# EAGLE board 13451_Micro_Bit_Breakout_panel.v02 (EAGLE 7.5.0)
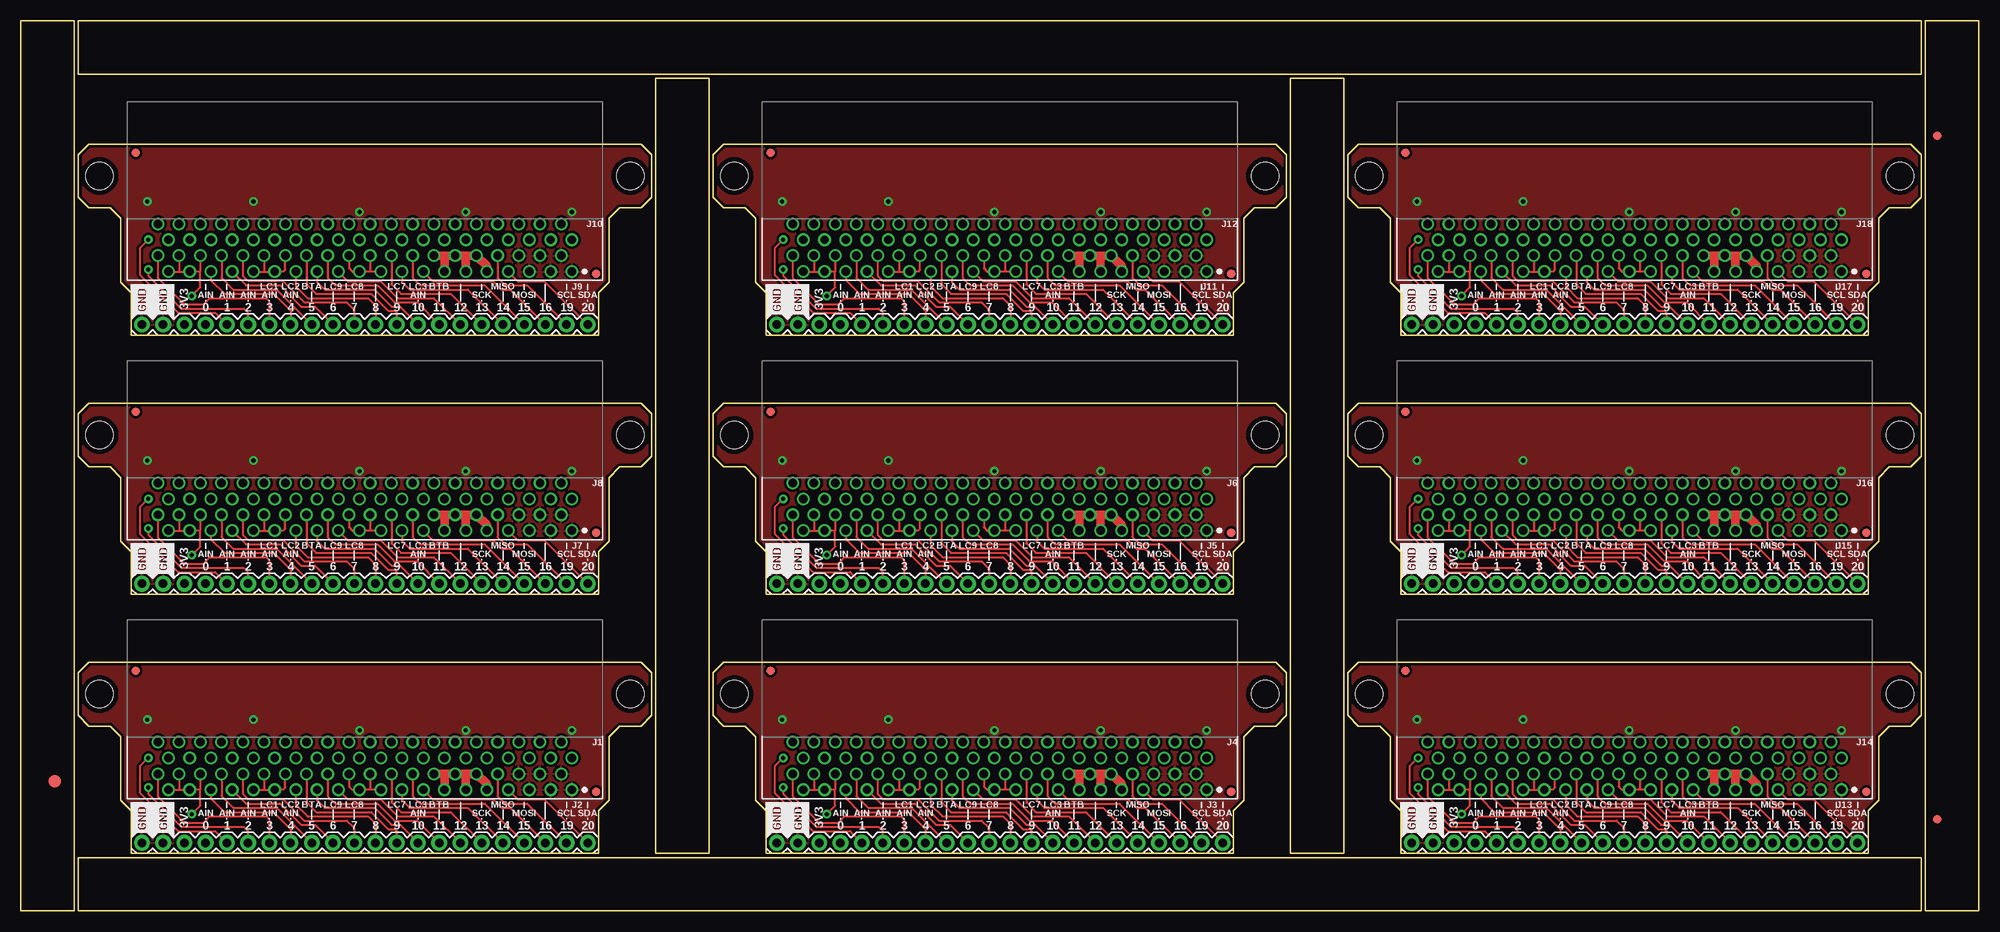
[diagram p0: board, top side]
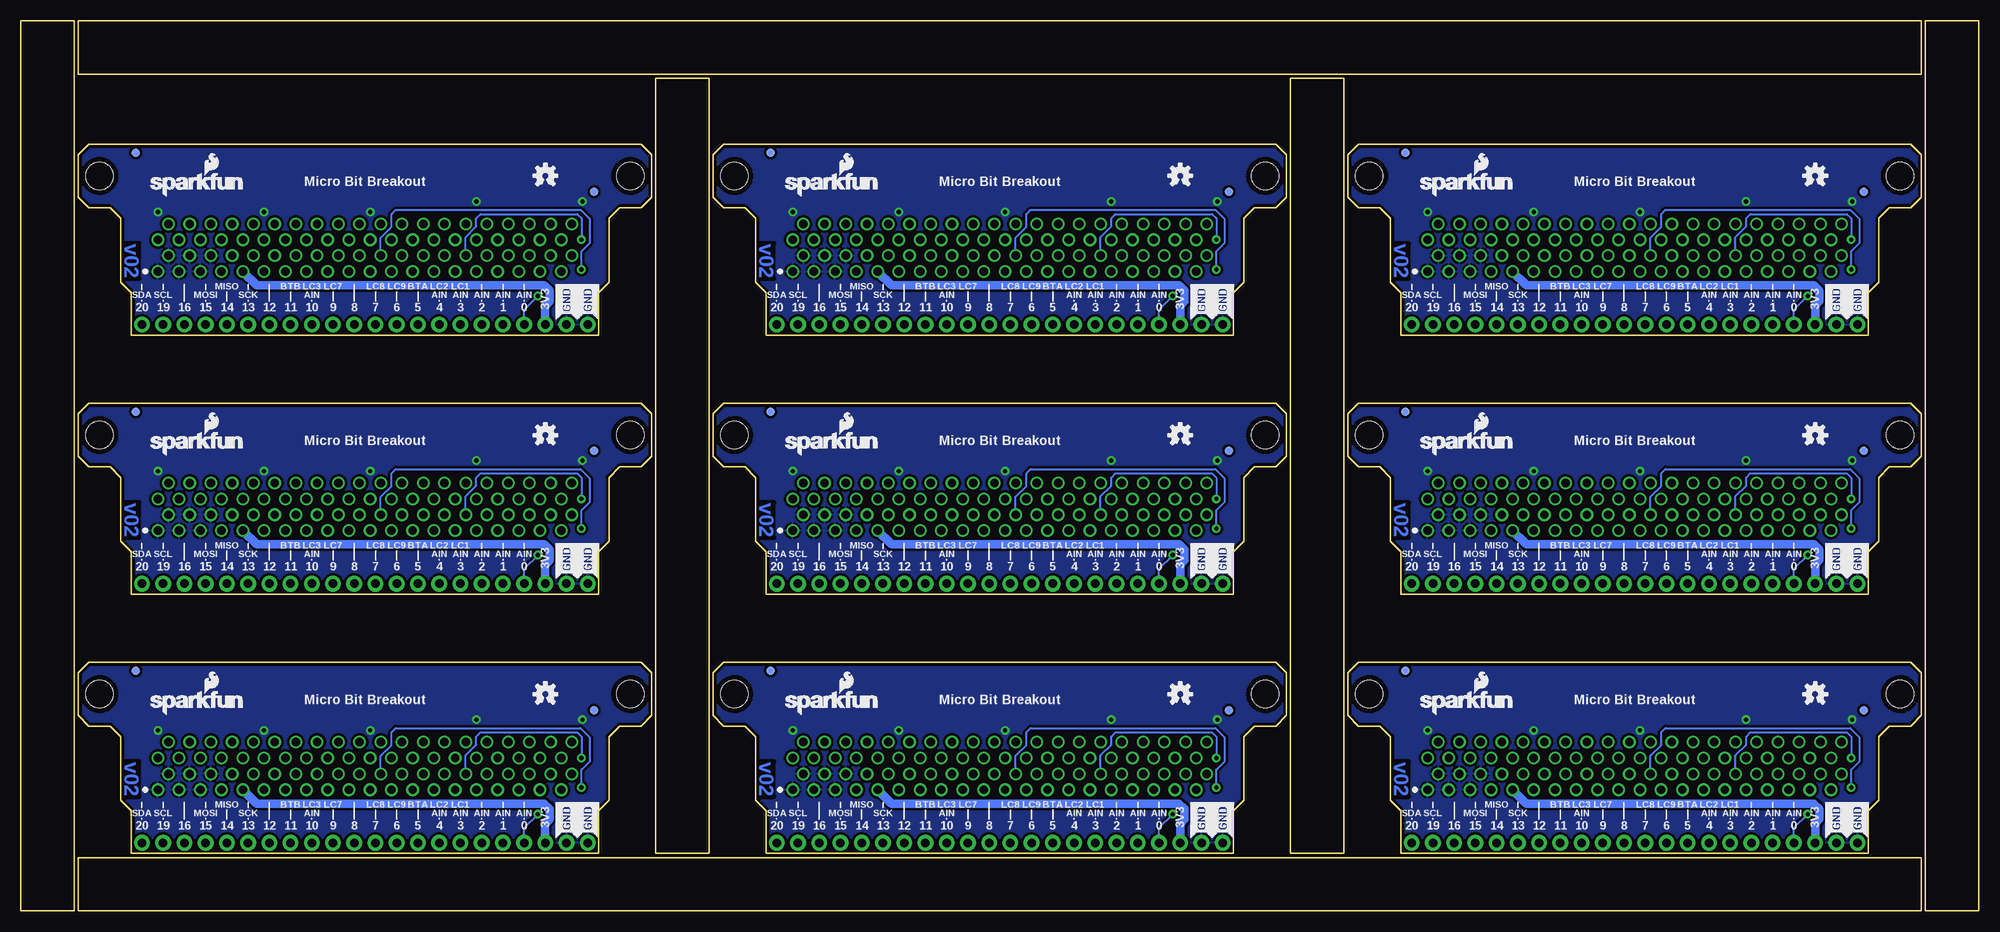
[diagram p1: board, bottom side, seen from below]

Size 234.19 x 106.43 mm. Coordinates in mm from the lower left corner, seen from the top.
Outline: 6.35,79.25 6.35,0 0,0 0,29.72
Outline: 0,27.18 0,106.43 6.35,106.43 6.35,76.71
Outline: 82.3,79.25 82.3,6.86 75.95,6.86 75.95,29.72
Outline: 75.95,27.18 75.95,99.57 82.3,99.57 82.3,76.71
Outline: 158.24,79.25 158.24,6.86 151.89,6.86 151.89,29.72
Outline: 151.89,27.18 151.89,99.57 158.24,99.57 158.24,76.71
Outline: 157.48,106.43 227.33,106.43 227.33,100.08 207.01,100.08
Outline: 209.55,100.08 6.86,100.08 6.86,106.43 160.02,106.43
Outline: 227.84,19.05 227.84,106.43 234.19,106.43 234.19,68.58
Outline: 234.19,71.12 234.19,0 227.84,0 227.84,21.59
Outline: 79.25,0 6.86,0 6.86,6.35 29.72,6.35
Outline: 27.18,6.35 227.33,6.35 227.33,0 76.71,0
Outline: 13.21,6.86 69.09,6.86 69.09,11.94 70.36,13.21 70.36,20.83 71.63,22.1 74.17,22.1 75.44,23.37 75.44,28.45 74.17,29.72 8.13,29.72 6.86,28.45 6.86,23.37 8.13,22.1 10.67,22.1 11.94,20.83 11.94,13.21 13.21,11.94 13.21,6.86
Outline: 13.21,37.85 69.09,37.85 69.09,42.93 70.36,44.2 70.36,51.82 71.63,53.09 74.17,53.09 75.44,54.36 75.44,59.44 74.17,60.71 8.13,60.71 6.86,59.44 6.86,54.36 8.13,53.09 10.67,53.09 11.94,51.82 11.94,44.2 13.21,42.93 13.21,37.85
Outline: 13.21,68.83 69.09,68.83 69.09,73.91 70.36,75.18 70.36,82.8 71.63,84.07 74.17,84.07 75.44,85.34 75.44,90.42 74.17,91.69 8.13,91.69 6.86,90.42 6.86,85.34 8.13,84.07 10.67,84.07 11.94,82.8 11.94,75.18 13.21,73.91 13.21,68.83
Outline: 89.15,6.86 145.03,6.86 145.03,11.94 146.3,13.21 146.3,20.83 147.57,22.1 150.11,22.1 151.38,23.37 151.38,28.45 150.11,29.72 84.07,29.72 82.8,28.45 82.8,23.37 84.07,22.1 86.61,22.1 87.88,20.83 87.88,13.21 89.15,11.94 89.15,6.86
Outline: 89.15,37.85 145.03,37.85 145.03,42.93 146.3,44.2 146.3,51.82 147.57,53.09 150.11,53.09 151.38,54.36 151.38,59.44 150.11,60.71 84.07,60.71 82.8,59.44 82.8,54.36 84.07,53.09 86.61,53.09 87.88,51.82 87.88,44.2 89.15,42.93 89.15,37.85
Outline: 89.15,68.83 145.03,68.83 145.03,73.91 146.3,75.18 146.3,82.8 147.57,84.07 150.11,84.07 151.38,85.34 151.38,90.42 150.11,91.69 84.07,91.69 82.8,90.42 82.8,85.34 84.07,84.07 86.61,84.07 87.88,82.8 87.88,75.18 89.15,73.91 89.15,68.83
Outline: 165.1,6.86 220.98,6.86 220.98,11.94 222.25,13.21 222.25,20.83 223.52,22.1 226.06,22.1 227.33,23.37 227.33,28.45 226.06,29.72 160.02,29.72 158.75,28.45 158.75,23.37 160.02,22.1 162.56,22.1 163.83,20.83 163.83,13.21 165.1,11.94 165.1,6.86
Outline: 165.1,37.85 220.98,37.85 220.98,42.93 222.25,44.2 222.25,51.82 223.52,53.09 226.06,53.09 227.33,54.36 227.33,59.44 226.06,60.71 160.02,60.71 158.75,59.44 158.75,54.36 160.02,53.09 162.56,53.09 163.83,51.82 163.83,44.2 165.1,42.93 165.1,37.85
Outline: 165.1,68.83 220.98,68.83 220.98,73.91 222.25,75.18 222.25,82.8 223.52,84.07 226.06,84.07 227.33,85.34 227.33,90.42 226.06,91.69 160.02,91.69 158.75,90.42 158.75,85.34 160.02,84.07 162.56,84.07 163.83,82.8 163.83,75.18 165.1,73.91 165.1,68.83
Copper layers (1*16): Top 0.035mm / dielectric 1.5mm / Bottom 0.035mm
Design rules "SparkFun-2-layer-STANDARD": minimum track width 10mil, minimum drill 20mil, track to track 10mil, track to pad 8mil, pad to pad 8mil, via to via 10mil, smd to smd 8mil, copper to edge 8mil, drill to drill 8mil, minimum pad ring 10mil, minimum via ring 10mil, stop-mask expansion 4mil, vias tented up to drill 25mil, thermal gap 10mil

## Footprints (pad centres in the part's own frame; a part is rotated, then mirrored left to right if it is on the bottom)
FIDUCIAL-1.5X3 = smd 1.5 x 1.5: 1 0,0
FIDUCIAL-1X2 = smd 1 x 1: 1 0,0
STAND-OFF = hole 3.302: 0,0
VEC-127-080-R = drill 1: A1 -24.765,0; A2 -23.495,-1.9; A3 -22.225,0; A4 -20.955,-1.9; A5 -19.685,0; A6 -18.415,-1.9; A7 -17.145,0; A8 -15.875,-1.9; A9 -14.605,0; A10 -13.335,-1.9; A11 -12.065,0; A12 -10.795,-1.9; A13 -9.525,0; A14 -8.255,-1.9; A15 -6.985,0; A16 -5.715,-1.9; A17 -4.445,0; A18 -3.175,-1.9; A19 -1.905,0; A20 -0.635,-1.9; A21 0.635,0; A22 1.905,-1.9; A23 3.175,0; A24 4.445,-1.9; A25 5.715,0; A26 6.985,-1.9; A27 8.255,0; A28 9.525,-1.9; A29 10.795,0; A30 12.065,-1.9; A31 13.335,0; A32 14.605,-1.9; A33 15.875,0; A34 17.145,-1.9; A35 18.415,0; A36 19.685,-1.9; A37 20.955,0; A38 22.225,-1.9; A39 23.495,0; A40 24.765,-1.9; B1 -24.765,-3.8; B2 -23.495,-5.7; B3 -22.225,-3.8; B4 -20.955,-5.7; B5 -19.685,-3.8; B6 -18.415,-5.7; B7 -17.145,-3.8; B8 -15.875,-5.7; B9 -14.605,-3.8; B10 -13.335,-5.7; B11 -12.065,-3.8; B12 -10.795,-5.7; B13 -9.525,-3.8; B14 -8.255,-5.7; B15 -6.985,-3.8; B16 -5.715,-5.7; B17 -4.445,-3.8; B18 -3.175,-5.7; B19 -1.905,-3.8; B20 -0.635,-5.7; B21 0.635,-3.8; B22 1.905,-5.7; B23 3.175,-3.8; B24 4.445,-5.7; B25 5.715,-3.8; B26 6.985,-5.7; B27 8.255,-3.8; B28 9.525,-5.7; B29 10.795,-3.8; B30 12.065,-5.7; B31 13.335,-3.8; B32 14.605,-5.7; B33 15.875,-3.8; B34 17.145,-5.7; B35 18.415,-3.8; B36 19.685,-5.7; B37 20.955,-3.8; B38 22.225,-5.7; B39 23.495,-3.8; B40 24.765,-5.7
1X22 = drill 1.016 pad 1.88: 1 0,0; 2 2.54,0; 3 5.08,0; 4 7.62,0; 5 10.16,0; 6 12.7,0; 7 15.24,0; 8 17.78,0; 9 20.32,0; 10 22.86,0; 11 25.4,0; 12 27.94,0; 13 30.48,0; 14 33.02,0; 15 35.56,0; 16 38.1,0; 17 40.64,0; 18 43.18,0; 19 45.72,0; 20 48.26,0; 21 50.8,0; 22 53.34,0

## Placement (x,y rotation side)
E$1  [FIDUCIAL-1.5X3]  4.06,15.49 0 top
E$9  [FIDUCIAL-1X2]  229.24,92.71 180 top
E$10  [FIDUCIAL-1X2]  229.24,10.92 0 top
FD1  FIDUCIAL1X2  [FIDUCIAL-1X2]  13.72,28.7 0 top
FD2  FIDUCIAL1X2  [FIDUCIAL-1X2]  68.83,14.22 0 top
FD3  FIDUCIAL1X2  [FIDUCIAL-1X2]  68.58,28.7 0 bottom
FD4  FIDUCIAL1X2  [FIDUCIAL-1X2]  13.72,24 0 bottom
FD5  FIDUCIAL1X2  [FIDUCIAL-1X2]  89.66,28.7 0 top
FD6  FIDUCIAL1X2  [FIDUCIAL-1X2]  144.78,14.22 0 top
FD7  FIDUCIAL1X2  [FIDUCIAL-1X2]  144.53,28.7 0 bottom
FD8  FIDUCIAL1X2  [FIDUCIAL-1X2]  89.66,24 0 bottom
FD9  FIDUCIAL1X2  [FIDUCIAL-1X2]  89.66,59.69 0 top
FD10  FIDUCIAL1X2  [FIDUCIAL-1X2]  144.78,45.21 0 top
FD11  FIDUCIAL1X2  [FIDUCIAL-1X2]  144.53,59.69 0 bottom
FD12  FIDUCIAL1X2  [FIDUCIAL-1X2]  89.66,54.99 0 bottom
FD13  FIDUCIAL1X2  [FIDUCIAL-1X2]  13.72,59.69 0 top
FD14  FIDUCIAL1X2  [FIDUCIAL-1X2]  68.83,45.21 0 top
FD15  FIDUCIAL1X2  [FIDUCIAL-1X2]  68.58,59.69 0 bottom
FD16  FIDUCIAL1X2  [FIDUCIAL-1X2]  13.72,54.99 0 bottom
FD17  FIDUCIAL1X2  [FIDUCIAL-1X2]  13.72,90.68 0 top
FD18  FIDUCIAL1X2  [FIDUCIAL-1X2]  68.83,76.2 0 top
FD19  FIDUCIAL1X2  [FIDUCIAL-1X2]  68.58,90.68 0 bottom
FD20  FIDUCIAL1X2  [FIDUCIAL-1X2]  13.72,85.98 0 bottom
FD21  FIDUCIAL1X2  [FIDUCIAL-1X2]  89.66,90.68 0 top
FD22  FIDUCIAL1X2  [FIDUCIAL-1X2]  144.78,76.2 0 top
FD23  FIDUCIAL1X2  [FIDUCIAL-1X2]  144.53,90.68 0 bottom
FD24  FIDUCIAL1X2  [FIDUCIAL-1X2]  89.66,85.98 0 bottom
FD25  FIDUCIAL1X2  [FIDUCIAL-1X2]  165.61,28.7 0 top
FD26  FIDUCIAL1X2  [FIDUCIAL-1X2]  220.73,14.22 0 top
FD27  FIDUCIAL1X2  [FIDUCIAL-1X2]  220.47,28.7 0 bottom
FD28  FIDUCIAL1X2  [FIDUCIAL-1X2]  165.61,24 0 bottom
FD29  FIDUCIAL1X2  [FIDUCIAL-1X2]  165.61,59.69 0 top
FD30  FIDUCIAL1X2  [FIDUCIAL-1X2]  220.73,45.21 0 top
FD31  FIDUCIAL1X2  [FIDUCIAL-1X2]  220.47,59.69 0 bottom
FD32  FIDUCIAL1X2  [FIDUCIAL-1X2]  165.61,54.99 0 bottom
FD33  FIDUCIAL1X2  [FIDUCIAL-1X2]  165.61,90.68 0 top
FD34  FIDUCIAL1X2  [FIDUCIAL-1X2]  220.73,76.2 0 top
FD35  FIDUCIAL1X2  [FIDUCIAL-1X2]  220.47,90.68 0 bottom
FD36  FIDUCIAL1X2  [FIDUCIAL-1X2]  165.61,85.98 0 bottom
H1  STAND-OFF  [STAND-OFF]  9.4,25.91 0 top
H2  STAND-OFF  [STAND-OFF]  72.9,25.91 0 top
H3  STAND-OFF  [STAND-OFF]  85.34,25.91 0 top
H4  STAND-OFF  [STAND-OFF]  148.84,25.91 0 top
H5  STAND-OFF  [STAND-OFF]  85.34,56.9 0 top
H6  STAND-OFF  [STAND-OFF]  148.84,56.9 0 top
H7  STAND-OFF  [STAND-OFF]  9.4,56.9 0 top
H8  STAND-OFF  [STAND-OFF]  72.9,56.9 0 top
H9  STAND-OFF  [STAND-OFF]  9.4,87.88 0 top
H10  STAND-OFF  [STAND-OFF]  72.9,87.88 0 top
H11  STAND-OFF  [STAND-OFF]  85.34,87.88 0 top
H12  STAND-OFF  [STAND-OFF]  148.84,87.88 0 top
H13  STAND-OFF  [STAND-OFF]  161.29,25.91 0 top
H14  STAND-OFF  [STAND-OFF]  224.79,25.91 0 top
H15  STAND-OFF  [STAND-OFF]  161.29,56.9 0 top
H16  STAND-OFF  [STAND-OFF]  224.79,56.9 0 top
H17  STAND-OFF  [STAND-OFF]  161.29,87.88 0 top
H18  STAND-OFF  [STAND-OFF]  224.79,87.88 0 top
J1  EDGE-80PTH-RA  [VEC-127-080-R]  41.15,14.48 180 top
J2  M22PTH  [1X22]  14.48,8.13 0 top
J3  M22PTH  [1X22]  90.42,8.13 0 top
J4  EDGE-80PTH-RA  [VEC-127-080-R]  117.09,14.48 180 top
J5  M22PTH  [1X22]  90.42,39.12 0 top
J6  EDGE-80PTH-RA  [VEC-127-080-R]  117.09,45.47 180 top
J7  M22PTH  [1X22]  14.48,39.12 0 top
J8  EDGE-80PTH-RA  [VEC-127-080-R]  41.15,45.47 180 top
J9  M22PTH  [1X22]  14.48,70.1 0 top
J10  EDGE-80PTH-RA  [VEC-127-080-R]  41.15,76.45 180 top
J11  M22PTH  [1X22]  90.42,70.1 0 top
J12  EDGE-80PTH-RA  [VEC-127-080-R]  117.09,76.45 180 top
J13  M22PTH  [1X22]  166.37,8.13 0 top
J14  EDGE-80PTH-RA  [VEC-127-080-R]  193.04,14.48 180 top
J15  M22PTH  [1X22]  166.37,39.12 0 top
J16  EDGE-80PTH-RA  [VEC-127-080-R]  193.04,45.47 180 top
J17  M22PTH  [1X22]  166.37,70.1 0 top
J18  EDGE-80PTH-RA  [VEC-127-080-R]  193.04,76.45 180 top
LOGO1  OSHW-LOGOS  [OSHW-LOGO-S]  95.5,25.91 0 bottom
LOGO2  SFE_LOGO_NAME_FLAME.1_INCH  [SFE_LOGO_NAME_FLAME_.1]  67.18,23.37 0 bottom
LOGO3  OSHW-LOGOS  [OSHW-LOGO-S]  19.56,25.91 0 bottom
LOGO4  SFE_LOGO_NAME_FLAME.1_INCH  [SFE_LOGO_NAME_FLAME_.1]  143.13,23.37 0 bottom
LOGO5  OSHW-LOGOS  [OSHW-LOGO-S]  95.5,56.9 0 bottom
LOGO6  SFE_LOGO_NAME_FLAME.1_INCH  [SFE_LOGO_NAME_FLAME_.1]  143.13,54.36 0 bottom
LOGO7  OSHW-LOGOS  [OSHW-LOGO-S]  19.56,56.9 0 bottom
LOGO8  SFE_LOGO_NAME_FLAME.1_INCH  [SFE_LOGO_NAME_FLAME_.1]  67.18,54.36 0 bottom
LOGO9  OSHW-LOGOS  [OSHW-LOGO-S]  19.56,87.88 0 bottom
LOGO10  SFE_LOGO_NAME_FLAME.1_INCH  [SFE_LOGO_NAME_FLAME_.1]  67.18,85.34 0 bottom
LOGO11  OSHW-LOGOS  [OSHW-LOGO-S]  95.5,87.88 0 bottom
LOGO12  SFE_LOGO_NAME_FLAME.1_INCH  [SFE_LOGO_NAME_FLAME_.1]  143.13,85.34 0 bottom
LOGO13  OSHW-LOGOS  [OSHW-LOGO-S]  171.45,25.91 0 bottom
LOGO14  SFE_LOGO_NAME_FLAME.1_INCH  [SFE_LOGO_NAME_FLAME_.1]  219.07,23.37 0 bottom
LOGO15  OSHW-LOGOS  [OSHW-LOGO-S]  171.45,56.9 0 bottom
LOGO16  SFE_LOGO_NAME_FLAME.1_INCH  [SFE_LOGO_NAME_FLAME_.1]  219.07,54.36 0 bottom
LOGO17  OSHW-LOGOS  [OSHW-LOGO-S]  171.45,87.88 0 bottom
LOGO18  SFE_LOGO_NAME_FLAME.1_INCH  [SFE_LOGO_NAME_FLAME_.1]  219.07,85.34 0 bottom
U$1  [NEGASILK_MICRO_BIT_BREAKOUT]  13.21,8.76 0 top
U$2  [NEGASILK_MICRO_BIT_BREAKOUT]  18.29,8.76 0 bottom
U$3  [NEGASILK_MICRO_BIT_BREAKOUT]  89.15,8.76 0 top
U$4  [NEGASILK_MICRO_BIT_BREAKOUT]  94.23,8.76 0 bottom
U$5  [NEGASILK_MICRO_BIT_BREAKOUT]  89.15,39.75 0 top
U$6  [NEGASILK_MICRO_BIT_BREAKOUT]  94.23,39.75 0 bottom
U$7  [NEGASILK_MICRO_BIT_BREAKOUT]  13.21,39.75 0 top
U$8  [NEGASILK_MICRO_BIT_BREAKOUT]  18.29,39.75 0 bottom
U$9  [NEGASILK_MICRO_BIT_BREAKOUT]  13.21,70.74 0 top
U$10  [NEGASILK_MICRO_BIT_BREAKOUT]  18.29,70.74 0 bottom
U$11  [NEGASILK_MICRO_BIT_BREAKOUT]  89.15,70.74 0 top
U$12  [NEGASILK_MICRO_BIT_BREAKOUT]  94.23,70.74 0 bottom
U$13  [NEGASILK_MICRO_BIT_BREAKOUT]  165.1,8.76 0 top
U$14  [NEGASILK_MICRO_BIT_BREAKOUT]  170.18,8.76 0 bottom
U$15  [NEGASILK_MICRO_BIT_BREAKOUT]  165.1,39.75 0 top
U$16  [NEGASILK_MICRO_BIT_BREAKOUT]  170.18,39.75 0 bottom
U$17  [NEGASILK_MICRO_BIT_BREAKOUT]  165.1,70.74 0 top
U$18  [NEGASILK_MICRO_BIT_BREAKOUT]  170.18,70.74 0 bottom

## Library data of the parts
E$1 = SparkFun-Retired
E$9 E$10 FD1-FD36 LOGO1-LOGO18 = SparkFun-Aesthetics
H1-H18 = SparkFun-Electromechanical
J1 J4 J6 J8 J10 J12 J14 J16 J18 = local_lib; PROD_ID: CONN-13452
J2 J3 J5 J7 J9 J11 J13 J15 J17 = local_lib; PROD_ID: CONN-13453
U$1-U$18 = negasilk

## Nets
0: J1.A36 J1.A37 J1.A38 J1.A39 J2.4
1: J1.A28 J1.A29 J1.A30 J1.A31 J2.5
2: J1.A19 J1.A20 J1.A21 J1.A22 J2.6
3: J1.A40 J2.7
3.3V: J1.A9 J1.A10 J1.A11 J1.A12 J1.A13 J1.A14 J2.3
3.3V1: J3.3 J4.A9 J4.A10 J4.A11 J4.A12 J4.A13 J4.A14
3.3V2: J5.3 J6.A9 J6.A10 J6.A11 J6.A12 J6.A13 J6.A14
3.3V3: J7.3 J8.A9 J8.A10 J8.A11 J8.A12 J8.A13 J8.A14
3.3V4: J9.3 J10.A9 J10.A10 J10.A11 J10.A12 J10.A13 J10.A14
3.3V5: J11.3 J12.A9 J12.A10 J12.A11 J12.A12 J12.A13 J12.A14
3.3V6: J13.3 J14.A9 J14.A10 J14.A11 J14.A12 J14.A13 J14.A14
3.3V7: J15.3 J16.A9 J16.A10 J16.A11 J16.A12 J16.A13 J16.A14
3.3V8: J17.3 J18.A9 J18.A10 J18.A11 J18.A12 J18.A13 J18.A14
4: J1.A35 J2.8
5: J1.A34 J2.9
6: J1.A33 J2.10
7: J1.A32 J2.11
8: J1.A27 J2.12
9: J1.A26 J2.13
10: J1.A25 J2.14
11: J1.A24 J2.15
12: J1.A23 J2.16
13: J1.A18 J2.17
14: J1.A17 J2.18
15: J1.A16 J2.19
16: J1.A15 J2.20
17: J3.22 J4.A7
18: J3.21 J4.A8
19: J1.A8 J2.21
20: J1.A7 J2.22
21: J3.20 J4.A15
22: J3.19 J4.A16
23: J3.18 J4.A17
24: J3.17 J4.A18
25: J3.6 J4.A19 J4.A20 J4.A21 J4.A22
26: J3.16 J4.A23
27: J3.15 J4.A24
28: J3.14 J4.A25
29: J3.13 J4.A26
30: J3.12 J4.A27
31: J3.5 J4.A28 J4.A29 J4.A30 J4.A31
32: J3.11 J4.A32
33: J3.10 J4.A33
34: J3.9 J4.A34
35: J3.8 J4.A35
36: J3.4 J4.A36 J4.A37 J4.A38 J4.A39
37: J3.7 J4.A40
38: J5.22 J6.A7
39: J5.21 J6.A8
40: J5.20 J6.A15
41: J5.19 J6.A16
42: J5.18 J6.A17
43: J5.17 J6.A18
44: J5.6 J6.A19 J6.A20 J6.A21 J6.A22
45: J5.16 J6.A23
46: J5.15 J6.A24
47: J5.14 J6.A25
48: J5.13 J6.A26
49: J5.12 J6.A27
50: J5.5 J6.A28 J6.A29 J6.A30 J6.A31
51: J5.11 J6.A32
52: J5.10 J6.A33
53: J5.9 J6.A34
54: J5.8 J6.A35
55: J5.4 J6.A36 J6.A37 J6.A38 J6.A39
56: J5.7 J6.A40
57: J7.22 J8.A7
58: J7.21 J8.A8
59: J7.20 J8.A15
60: J7.19 J8.A16
61: J7.18 J8.A17
62: J7.17 J8.A18
63: J7.6 J8.A19 J8.A20 J8.A21 J8.A22
64: J7.16 J8.A23
65: J7.15 J8.A24
66: J7.14 J8.A25
67: J7.13 J8.A26
68: J7.12 J8.A27
69: J7.5 J8.A28 J8.A29 J8.A30 J8.A31
70: J7.11 J8.A32
71: J7.10 J8.A33
72: J7.9 J8.A34
73: J7.8 J8.A35
74: J7.4 J8.A36 J8.A37 J8.A38 J8.A39
75: J7.7 J8.A40
76: J9.22 J10.A7
77: J9.21 J10.A8
78: J9.20 J10.A15
79: J9.19 J10.A16
80: J9.18 J10.A17
81: J9.17 J10.A18
82: J9.6 J10.A19 J10.A20 J10.A21 J10.A22
83: J9.16 J10.A23
84: J9.15 J10.A24
85: J9.14 J10.A25
86: J9.13 J10.A26
87: J9.12 J10.A27
88: J9.5 J10.A28 J10.A29 J10.A30 J10.A31
89: J9.11 J10.A32
90: J9.10 J10.A33
91: J9.9 J10.A34
92: J9.8 J10.A35
93: J9.4 J10.A36 J10.A37 J10.A38 J10.A39
94: J9.7 J10.A40
95: J11.22 J12.A7
96: J11.21 J12.A8
97: J11.20 J12.A15
98: J11.19 J12.A16
99: J11.18 J12.A17
100: J11.17 J12.A18
101: J11.6 J12.A19 J12.A20 J12.A21 J12.A22
102: J11.16 J12.A23
103: J11.15 J12.A24
104: J11.14 J12.A25
105: J11.13 J12.A26
106: J11.12 J12.A27
107: J11.5 J12.A28 J12.A29 J12.A30 J12.A31
108: J11.11 J12.A32
109: J11.10 J12.A33
110: J11.9 J12.A34
111: J11.8 J12.A35
112: J11.4 J12.A36 J12.A37 J12.A38 J12.A39
113: J11.7 J12.A40
114: J13.22 J14.A7
115: J13.21 J14.A8
116: J13.20 J14.A15
117: J13.19 J14.A16
118: J13.18 J14.A17
119: J13.17 J14.A18
120: J13.6 J14.A19 J14.A20 J14.A21 J14.A22
121: J13.16 J14.A23
122: J13.15 J14.A24
123: J13.14 J14.A25
124: J13.13 J14.A26
125: J13.12 J14.A27
126: J13.5 J14.A28 J14.A29 J14.A30 J14.A31
127: J13.11 J14.A32
128: J13.10 J14.A33
129: J13.9 J14.A34
130: J13.8 J14.A35
131: J13.4 J14.A36 J14.A37 J14.A38 J14.A39
132: J13.7 J14.A40
133: J15.22 J16.A7
134: J15.21 J16.A8
135: J15.20 J16.A15
136: J15.19 J16.A16
137: J15.18 J16.A17
138: J15.17 J16.A18
139: J15.6 J16.A19 J16.A20 J16.A21 J16.A22
140: J15.16 J16.A23
141: J15.15 J16.A24
142: J15.14 J16.A25
143: J15.13 J16.A26
144: J15.12 J16.A27
145: J15.5 J16.A28 J16.A29 J16.A30 J16.A31
146: J15.11 J16.A32
147: J15.10 J16.A33
148: J15.9 J16.A34
149: J15.8 J16.A35
150: J15.4 J16.A36 J16.A37 J16.A38 J16.A39
151: J15.7 J16.A40
152: J17.22 J18.A7
153: J17.21 J18.A8
154: J17.20 J18.A15
155: J17.19 J18.A16
156: J17.18 J18.A17
157: J17.17 J18.A18
158: J17.6 J18.A19 J18.A20 J18.A21 J18.A22
159: J17.16 J18.A23
160: J17.15 J18.A24
161: J17.14 J18.A25
162: J17.13 J18.A26
163: J17.12 J18.A27
164: J17.5 J18.A28 J18.A29 J18.A30 J18.A31
165: J17.11 J18.A32
166: J17.10 J18.A33
167: J17.9 J18.A34
168: J17.8 J18.A35
169: J17.4 J18.A36 J18.A37 J18.A38 J18.A39
170: J17.7 J18.A40
GND: J1.A1 J1.A2 J1.A3 J1.A4 J1.A5 J1.A6 J2.1 J2.2
GND1: J3.1 J3.2 J4.A1 J4.A2 J4.A3 J4.A4 J4.A5 J4.A6
GND2: J5.1 J5.2 J6.A1 J6.A2 J6.A3 J6.A4 J6.A5 J6.A6
GND3: J7.1 J7.2 J8.A1 J8.A2 J8.A3 J8.A4 J8.A5 J8.A6
GND4: J9.1 J9.2 J10.A1 J10.A2 J10.A3 J10.A4 J10.A5 J10.A6
GND5: J11.1 J11.2 J12.A1 J12.A2 J12.A3 J12.A4 J12.A5 J12.A6
GND6: J13.1 J13.2 J14.A1 J14.A2 J14.A3 J14.A4 J14.A5 J14.A6
GND7: J15.1 J15.2 J16.A1 J16.A2 J16.A3 J16.A4 J16.A5 J16.A6
GND8: J17.1 J17.2 J18.A1 J18.A2 J18.A3 J18.A4 J18.A5 J18.A6

## Tracks (layer width: path | path; a pad name or v marks a point on that pad's centre or on a via)
0  (via drill 0.51)
  Top 0.254: J1.A39 18.92,14.48 | 18.92,14.48 J1.A37 21.46,14.48 | J1.A38 18.92,14.48 | J1.A36 21.46,14.48 | v20.45,11.56 21.46,12.57 21.46,14.48
  Bottom 0.254: J2.4 22.1,9.91 v20.45,11.56
1  (via drill 0.51)
  Top 0.254: J1.A31 29.08,14.48 | 29.08,14.48 J1.A29 31.37,14.48 31.62,14.73 J1.A28 | J2.5 23.24,9.53 18.8,9.53 14.22,14.1 14.22,17.27 v15.24,18.29 | J1.A30 29.08,14.48
  Bottom 0.254: v15.24,18.29 15.24,20.83 15.75,21.34 27.3,21.34 27.81,20.83 27.81,19.86 29.08,18.59 J1.A30
2  (via drill 0.51)
  Top 0.254: J1.A19 41.78,14.48 | 41.78,14.48 J1.A21 39.62,14.48 39.24,14.86 J1.A22 | J1.A20 41.78,14.48 | J2.6 27.18,9.53 26.67,10.03 19.18,10.03 15.24,13.97 v15.24,14.73
  Bottom 0.254: J1.A22 39.24,18.54 37.97,19.81 37.97,21.34 37.47,21.84 15.37,21.84 14.22,20.7 14.22,17.91 15.24,16.89 v15.24,14.73
3
  Top 0.254: J2.7 29.72,10.92 29.34,11.3 22.61,11.3 21.84,10.54 19.56,10.54 16.38,13.72 J1.A40
3.3V
  Top 1.016: J1.A9 55.75,15.11 J1.A10 53.09,16.38 | 53.09,16.38 J1.A12 50.55,16.38 | 50.55,16.38 J1.A14 | J1.A13 50.67,16.25 50.55,16.38 | J1.A11 53.21,16.25 53.09,16.38
  Bottom 1.016: J2.3 19.56,10.41 19.05,10.92 19.05,12.19 19.68,12.83 54.1,12.83 J1.A9
3.3V1
  Top 1.016: J4.A9 131.7,15.11 J4.A10 129.03,16.38 | 129.03,16.38 J4.A12 126.49,16.38 | 126.49,16.38 J4.A14 | J4.A13 126.62,16.25 126.49,16.38 | J4.A11 129.16,16.25 129.03,16.38
  Bottom 1.016: J3.3 95.5,10.41 95,10.92 95,12.19 95.63,12.83 130.05,12.83 J4.A9
3.3V2
  Top 1.016: J6.A9 131.7,46.1 J6.A10 129.03,47.37 | 129.03,47.37 J6.A12 126.49,47.37 | 126.49,47.37 J6.A14 | J6.A13 126.62,47.24 126.49,47.37 | J6.A11 129.16,47.24 129.03,47.37
  Bottom 1.016: J5.3 95.5,41.4 95,41.91 95,43.18 95.63,43.81 130.05,43.81 J6.A9
3.3V3
  Top 1.016: J8.A9 55.75,46.1 J8.A10 53.09,47.37 | 53.09,47.37 J8.A12 50.55,47.37 | 50.55,47.37 J8.A14 | J8.A13 50.67,47.24 50.55,47.37 | J8.A11 53.21,47.24 53.09,47.37
  Bottom 1.016: J7.3 19.56,41.4 19.05,41.91 19.05,43.18 19.68,43.81 54.1,43.81 J8.A9
3.3V4
  Top 1.016: J10.A9 55.75,77.08 J10.A10 53.09,78.35 | 53.09,78.35 J10.A12 50.55,78.35 | 50.55,78.35 J10.A14 | J10.A13 50.67,78.23 50.55,78.35 | J10.A11 53.21,78.23 53.09,78.35
  Bottom 1.016: J9.3 19.56,72.39 19.05,72.9 19.05,74.17 19.68,74.8 54.1,74.8 J10.A9
3.3V5
  Top 1.016: J12.A9 131.7,77.08 J12.A10 129.03,78.35 | 129.03,78.35 J12.A12 126.49,78.35 | 126.49,78.35 J12.A14 | J12.A13 126.62,78.23 126.49,78.35 | J12.A11 129.16,78.23 129.03,78.35
  Bottom 1.016: J11.3 95.5,72.39 95,72.9 95,74.17 95.63,74.8 130.05,74.8 J12.A9
3.3V6
  Top 1.016: J14.A9 207.65,15.11 J14.A10 204.98,16.38 | 204.98,16.38 J14.A12 202.44,16.38 | 202.44,16.38 J14.A14 | J14.A13 202.56,16.25 202.44,16.38 | J14.A11 205.1,16.25 204.98,16.38
  Bottom 1.016: J13.3 171.45,10.41 170.94,10.92 170.94,12.19 171.58,12.83 205.99,12.83 J14.A9
3.3V7
  Top 1.016: J16.A9 207.65,46.1 J16.A10 204.98,47.37 | 204.98,47.37 J16.A12 202.44,47.37 | 202.44,47.37 J16.A14 | J16.A13 202.56,47.24 202.44,47.37 | J16.A11 205.1,47.24 204.98,47.37
  Bottom 1.016: J15.3 171.45,41.4 170.94,41.91 170.94,43.18 171.58,43.81 205.99,43.81 J16.A9
3.3V8
  Top 1.016: J18.A9 207.65,77.08 J18.A10 204.98,78.35 | 204.98,78.35 J18.A12 202.44,78.35 | 202.44,78.35 J18.A14 | J18.A13 202.56,78.23 202.44,78.35 | J18.A11 205.1,78.23 204.98,78.35
  Bottom 1.016: J17.3 171.45,72.39 170.94,72.9 170.94,74.17 171.58,74.8 205.99,74.8 J18.A9
4
  Top 0.254: J1.A35 22.73,13.46 24.38,11.81 30.23,11.81 32.26,9.78 J2.8
5
  Top 0.254: J1.A34 24,13.72 25.4,12.32 30.61,12.32 J2.9
6
  Top 0.254: J2.10 35.18,10.29 33.53,10.29 30.99,12.83 26.92,12.83 J1.A33
7
  Top 0.254: J2.11 39.88,9.91 38.99,10.79 33.91,10.79 31.37,13.34 27.18,13.34 26.54,13.97 J1.A32
8
  Top 0.254: J1.A27 32.89,12.7 34.29,11.3 41.53,11.3 42.42,10.41 J2.12
9
  Top 0.254: J1.A26 34.16,12.95 35.31,11.81 41.91,11.81 43.94,9.78 44.7,9.78 44.96,9.53 J2.13
10
  Top 0.254: J2.14 45.34,10.29 44.32,10.29 42.29,12.32 36.32,12.32 35.43,13.21 J1.A25
11
  Top 0.254: J2.15 47.37,10.79 44.7,10.79 42.67,12.83 37.59,12.83 36.7,13.72 J1.A24
12
  Top 0.254: J2.16 49.4,11.3 45.09,11.3 43.05,13.34 39.12,13.34 J1.A23
13
  Top 0.254: J1.A18 44.32,12.95 45.47,11.81 51.44,11.81 J2.17
14
  Top 0.254: J1.A17 45.59,13.21 46.48,12.32 53.47,12.32 J2.18
15
  Top 0.254: J1.A16 46.86,13.72 47.75,12.83 55.5,12.83 J2.19
16
  Top 0.254: J1.A15 49.28,13.34 56.52,13.34 57.53,12.32 58.55,12.32 J2.20
17
  Top 0.254: J4.A7 135.38,13.34 138.56,13.34 J3.22
18
  Top 0.254: J4.A8 132.97,13.72 133.86,12.83 136.53,12.83 J3.21
19
  Top 0.254: J1.A8 57.02,13.72 57.91,12.83 60.58,12.83 J2.21
20
  Top 0.254: J1.A7 59.44,13.34 62.61,13.34 J2.22
21
  Top 0.254: J4.A15 125.22,13.34 132.46,13.34 133.48,12.32 134.49,12.32 J3.20
22
  Top 0.254: J4.A16 122.81,13.72 123.7,12.83 131.44,12.83 J3.19
23
  Top 0.254: J4.A17 121.54,13.21 122.43,12.32 129.41,12.32 J3.18
24
  Top 0.254: J4.A18 120.27,12.95 121.41,11.81 127.38,11.81 J3.17
25  (via drill 0.51)
  Top 0.254: J4.A19 117.73,14.48 | 117.73,14.48 J4.A21 115.57,14.48 115.19,14.86 J4.A22 | J4.A20 117.73,14.48 | J3.6 103.12,9.53 102.62,10.03 95.12,10.03 91.19,13.97 v91.19,14.73
  Bottom 0.254: J4.A22 115.19,18.54 113.92,19.81 113.92,21.34 113.41,21.84 91.31,21.84 90.17,20.7 90.17,17.91 91.19,16.89 v91.19,14.73
26
  Top 0.254: J3.16 125.35,11.3 121.03,11.3 119,13.34 115.06,13.34 J4.A23
27
  Top 0.254: J3.15 123.32,10.79 120.65,10.79 118.62,12.83 113.54,12.83 112.65,13.72 J4.A24
28
  Top 0.254: J3.14 121.28,10.29 120.27,10.29 118.24,12.32 112.27,12.32 111.38,13.21 J4.A25
29
  Top 0.254: J4.A26 110.11,12.95 111.25,11.81 117.86,11.81 119.89,9.78 120.65,9.78 120.9,9.53 J3.13
30
  Top 0.254: J4.A27 108.84,12.7 110.24,11.3 117.47,11.3 118.36,10.41 J3.12
31  (via drill 0.51)
  Top 0.254: J4.A31 105.03,14.48 | 105.03,14.48 J4.A29 107.31,14.48 107.57,14.73 J4.A28 | J3.5 99.19,9.53 94.74,9.53 90.17,14.1 90.17,17.27 v91.19,18.29 | J4.A30 105.03,14.48
  Bottom 0.254: v91.19,18.29 91.19,20.83 91.69,21.34 103.25,21.34 103.76,20.83 103.76,19.86 105.03,18.59 J4.A30
32
  Top 0.254: J3.11 115.82,9.91 114.94,10.79 109.86,10.79 107.31,13.34 103.12,13.34 102.49,13.97 J4.A32
33
  Top 0.254: J3.10 111.12,10.29 109.47,10.29 106.93,12.83 102.87,12.83 J4.A33
34
  Top 0.254: J4.A34 99.95,13.72 101.35,12.32 106.55,12.32 J3.9
35
  Top 0.254: J4.A35 98.68,13.46 100.33,11.81 106.17,11.81 108.2,9.78 J3.8
36  (via drill 0.51)
  Top 0.254: J4.A39 94.87,14.48 | 94.87,14.48 J4.A37 97.41,14.48 | J4.A38 94.87,14.48 | J4.A36 97.41,14.48 | v96.39,11.56 97.41,12.57 97.41,14.48
  Bottom 0.254: J3.4 98.04,9.91 v96.39,11.56
37
  Top 0.254: J3.7 105.66,10.92 105.28,11.3 98.55,11.3 97.79,10.54 95.5,10.54 92.33,13.72 J4.A40
38
  Top 0.254: J6.A7 135.38,44.32 138.56,44.32 J5.22
39
  Top 0.254: J6.A8 132.97,44.7 133.86,43.81 136.53,43.81 J5.21
40
  Top 0.254: J6.A15 125.22,44.32 132.46,44.32 133.48,43.31 134.49,43.31 J5.20
41
  Top 0.254: J6.A16 122.81,44.7 123.7,43.81 131.44,43.81 J5.19
42
  Top 0.254: J6.A17 121.54,44.2 122.43,43.31 129.41,43.31 J5.18
43
  Top 0.254: J6.A18 120.27,43.94 121.41,42.8 127.38,42.8 J5.17
44  (via drill 0.51)
  Top 0.254: J6.A19 117.73,45.47 | 117.73,45.47 J6.A21 115.57,45.47 115.19,45.85 J6.A22 | J6.A20 117.73,45.47 | J5.6 103.12,40.51 102.62,41.02 95.12,41.02 91.19,44.96 v91.19,45.72
  Bottom 0.254: J6.A22 115.19,49.53 113.92,50.8 113.92,52.32 113.41,52.83 91.31,52.83 90.17,51.69 90.17,48.9 91.19,47.88 v91.19,45.72
45
  Top 0.254: J5.16 125.35,42.29 121.03,42.29 119,44.32 115.06,44.32 J6.A23
46
  Top 0.254: J5.15 123.32,41.78 120.65,41.78 118.62,43.81 113.54,43.81 112.65,44.7 J6.A24
47
  Top 0.254: J5.14 121.28,41.27 120.27,41.27 118.24,43.31 112.27,43.31 111.38,44.2 J6.A25
48
  Top 0.254: J6.A26 110.11,43.94 111.25,42.8 117.86,42.8 119.89,40.77 120.65,40.77 120.9,40.51 J5.13
49
  Top 0.254: J6.A27 108.84,43.69 110.24,42.29 117.47,42.29 118.36,41.4 J5.12
50  (via drill 0.51)
  Top 0.254: J6.A31 105.03,45.47 | 105.03,45.47 J6.A29 107.31,45.47 107.57,45.72 J6.A28 | J5.5 99.19,40.51 94.74,40.51 90.17,45.09 90.17,48.26 v91.19,49.28 | J6.A30 105.03,45.47
  Bottom 0.254: v91.19,49.28 91.19,51.82 91.69,52.32 103.25,52.32 103.76,51.82 103.76,50.85 105.03,49.58 J6.A30
51
  Top 0.254: J5.11 115.82,40.89 114.94,41.78 109.86,41.78 107.31,44.32 103.12,44.32 102.49,44.96 J6.A32
52
  Top 0.254: J5.10 111.12,41.27 109.47,41.27 106.93,43.81 102.87,43.81 J6.A33
53
  Top 0.254: J6.A34 99.95,44.7 101.35,43.31 106.55,43.31 J5.9
54
  Top 0.254: J6.A35 98.68,44.45 100.33,42.8 106.17,42.8 108.2,40.77 J5.8
55  (via drill 0.51)
  Top 0.254: J6.A39 94.87,45.47 | 94.87,45.47 J6.A37 97.41,45.47 | J6.A38 94.87,45.47 | J6.A36 97.41,45.47 | v96.39,42.55 97.41,43.56 97.41,45.47
  Bottom 0.254: J5.4 98.04,40.89 v96.39,42.55
56
  Top 0.254: J5.7 105.66,41.91 105.28,42.29 98.55,42.29 97.79,41.53 95.5,41.53 92.33,44.7 J6.A40
57
  Top 0.254: J8.A7 59.44,44.32 62.61,44.32 J7.22
58
  Top 0.254: J8.A8 57.02,44.7 57.91,43.81 60.58,43.81 J7.21
59
  Top 0.254: J8.A15 49.28,44.32 56.52,44.32 57.53,43.31 58.55,43.31 J7.20
60
  Top 0.254: J8.A16 46.86,44.7 47.75,43.81 55.5,43.81 J7.19
61
  Top 0.254: J8.A17 45.59,44.2 46.48,43.31 53.47,43.31 J7.18
62
  Top 0.254: J8.A18 44.32,43.94 45.47,42.8 51.44,42.8 J7.17
63  (via drill 0.51)
  Top 0.254: J8.A19 41.78,45.47 | 41.78,45.47 J8.A21 39.62,45.47 39.24,45.85 J8.A22 | J8.A20 41.78,45.47 | J7.6 27.18,40.51 26.67,41.02 19.18,41.02 15.24,44.96 v15.24,45.72
  Bottom 0.254: J8.A22 39.24,49.53 37.97,50.8 37.97,52.32 37.47,52.83 15.37,52.83 14.22,51.69 14.22,48.9 15.24,47.88 v15.24,45.72
64
  Top 0.254: J7.16 49.4,42.29 45.09,42.29 43.05,44.32 39.12,44.32 J8.A23
65
  Top 0.254: J7.15 47.37,41.78 44.7,41.78 42.67,43.81 37.59,43.81 36.7,44.7 J8.A24
66
  Top 0.254: J7.14 45.34,41.27 44.32,41.27 42.29,43.31 36.32,43.31 35.43,44.2 J8.A25
67
  Top 0.254: J8.A26 34.16,43.94 35.31,42.8 41.91,42.8 43.94,40.77 44.7,40.77 44.96,40.51 J7.13
68
  Top 0.254: J8.A27 32.89,43.69 34.29,42.29 41.53,42.29 42.42,41.4 J7.12
69  (via drill 0.51)
  Top 0.254: J8.A31 29.08,45.47 | 29.08,45.47 J8.A29 31.37,45.47 31.62,45.72 J8.A28 | J7.5 23.24,40.51 18.8,40.51 14.22,45.09 14.22,48.26 v15.24,49.28 | J8.A30 29.08,45.47
  Bottom 0.254: v15.24,49.28 15.24,51.82 15.75,52.32 27.3,52.32 27.81,51.82 27.81,50.85 29.08,49.58 J8.A30
70
  Top 0.254: J7.11 39.88,40.89 38.99,41.78 33.91,41.78 31.37,44.32 27.18,44.32 26.54,44.96 J8.A32
71
  Top 0.254: J7.10 35.18,41.27 33.53,41.27 30.99,43.81 26.92,43.81 J8.A33
72
  Top 0.254: J8.A34 24,44.7 25.4,43.31 30.61,43.31 J7.9
73
  Top 0.254: J8.A35 22.73,44.45 24.38,42.8 30.23,42.8 32.26,40.77 J7.8
74  (via drill 0.51)
  Top 0.254: J8.A39 18.92,45.47 | 18.92,45.47 J8.A37 21.46,45.47 | J8.A38 18.92,45.47 | J8.A36 21.46,45.47 | v20.45,42.55 21.46,43.56 21.46,45.47
  Bottom 0.254: J7.4 22.1,40.89 v20.45,42.55
75
  Top 0.254: J7.7 29.72,41.91 29.34,42.29 22.61,42.29 21.84,41.53 19.56,41.53 16.38,44.7 J8.A40
76
  Top 0.254: J10.A7 59.44,75.31 62.61,75.31 J9.22
77
  Top 0.254: J10.A8 57.02,75.69 57.91,74.8 60.58,74.8 J9.21
78
  Top 0.254: J10.A15 49.28,75.31 56.52,75.31 57.53,74.3 58.55,74.3 J9.20
79
  Top 0.254: J10.A16 46.86,75.69 47.75,74.8 55.5,74.8 J9.19
80
  Top 0.254: J10.A17 45.59,75.18 46.48,74.3 53.47,74.3 J9.18
81
  Top 0.254: J10.A18 44.32,74.93 45.47,73.79 51.44,73.79 J9.17
82  (via drill 0.51)
  Top 0.254: J10.A19 41.78,76.45 | 41.78,76.45 J10.A21 39.62,76.45 39.24,76.83 J10.A22 | J10.A20 41.78,76.45 | J9.6 27.18,71.5 26.67,72.01 19.18,72.01 15.24,75.95 v15.24,76.71
  Bottom 0.254: J10.A22 39.24,80.52 37.97,81.79 37.97,83.31 37.47,83.82 15.37,83.82 14.22,82.68 14.22,79.88 15.24,78.87 v15.24,76.71
83
  Top 0.254: J9.16 49.4,73.28 45.09,73.28 43.05,75.31 39.12,75.31 J10.A23
84
  Top 0.254: J9.15 47.37,72.77 44.7,72.77 42.67,74.8 37.59,74.8 36.7,75.69 J10.A24
85
  Top 0.254: J9.14 45.34,72.26 44.32,72.26 42.29,74.3 36.32,74.3 35.43,75.18 J10.A25
86
  Top 0.254: J10.A26 34.16,74.93 35.31,73.79 41.91,73.79 43.94,71.75 44.7,71.75 44.96,71.5 J9.13
87
  Top 0.254: J10.A27 32.89,74.68 34.29,73.28 41.53,73.28 42.42,72.39 J9.12
88  (via drill 0.51)
  Top 0.254: J10.A31 29.08,76.45 | 29.08,76.45 J10.A29 31.37,76.45 31.62,76.71 J10.A28 | J9.5 23.24,71.5 18.8,71.5 14.22,76.07 14.22,79.25 v15.24,80.26 | J10.A30 29.08,76.45
  Bottom 0.254: v15.24,80.26 15.24,82.8 15.75,83.31 27.3,83.31 27.81,82.8 27.81,81.84 29.08,80.57 J10.A30
89
  Top 0.254: J9.11 39.88,71.88 38.99,72.77 33.91,72.77 31.37,75.31 27.18,75.31 26.54,75.95 J10.A32
90
  Top 0.254: J9.10 35.18,72.26 33.53,72.26 30.99,74.8 26.92,74.8 J10.A33
91
  Top 0.254: J10.A34 24,75.69 25.4,74.3 30.61,74.3 J9.9
92
  Top 0.254: J10.A35 22.73,75.44 24.38,73.79 30.23,73.79 32.26,71.75 J9.8
93  (via drill 0.51)
  Top 0.254: J10.A39 18.92,76.45 | 18.92,76.45 J10.A37 21.46,76.45 | J10.A38 18.92,76.45 | J10.A36 21.46,76.45 | v20.45,73.53 21.46,74.55 21.46,76.45
  Bottom 0.254: J9.4 22.1,71.88 v20.45,73.53
94
  Top 0.254: J9.7 29.72,72.9 29.34,73.28 22.61,73.28 21.84,72.52 19.56,72.52 16.38,75.69 J10.A40
95
  Top 0.254: J12.A7 135.38,75.31 138.56,75.31 J11.22
96
  Top 0.254: J12.A8 132.97,75.69 133.86,74.8 136.53,74.8 J11.21
97
  Top 0.254: J12.A15 125.22,75.31 132.46,75.31 133.48,74.3 134.49,74.3 J11.20
98
  Top 0.254: J12.A16 122.81,75.69 123.7,74.8 131.44,74.8 J11.19
99
  Top 0.254: J12.A17 121.54,75.18 122.43,74.3 129.41,74.3 J11.18
100
  Top 0.254: J12.A18 120.27,74.93 121.41,73.79 127.38,73.79 J11.17
101  (via drill 0.51)
  Top 0.254: J12.A19 117.73,76.45 | 117.73,76.45 J12.A21 115.57,76.45 115.19,76.83 J12.A22 | J12.A20 117.73,76.45 | J11.6 103.12,71.5 102.62,72.01 95.12,72.01 91.19,75.95 v91.19,76.71
  Bottom 0.254: J12.A22 115.19,80.52 113.92,81.79 113.92,83.31 113.41,83.82 91.31,83.82 90.17,82.68 90.17,79.88 91.19,78.87 v91.19,76.71
102
  Top 0.254: J11.16 125.35,73.28 121.03,73.28 119,75.31 115.06,75.31 J12.A23
103
  Top 0.254: J11.15 123.32,72.77 120.65,72.77 118.62,74.8 113.54,74.8 112.65,75.69 J12.A24
104
  Top 0.254: J11.14 121.28,72.26 120.27,72.26 118.24,74.3 112.27,74.3 111.38,75.18 J12.A25
105
  Top 0.254: J12.A26 110.11,74.93 111.25,73.79 117.86,73.79 119.89,71.75 120.65,71.75 120.9,71.5 J11.13
106
  Top 0.254: J12.A27 108.84,74.68 110.24,73.28 117.47,73.28 118.36,72.39 J11.12
107  (via drill 0.51)
  Top 0.254: J12.A31 105.03,76.45 | 105.03,76.45 J12.A29 107.31,76.45 107.57,76.71 J12.A28 | J11.5 99.19,71.5 94.74,71.5 90.17,76.07 90.17,79.25 v91.19,80.26 | J12.A30 105.03,76.45
  Bottom 0.254: v91.19,80.26 91.19,82.8 91.69,83.31 103.25,83.31 103.76,82.8 103.76,81.84 105.03,80.57 J12.A30
108
  Top 0.254: J11.11 115.82,71.88 114.94,72.77 109.86,72.77 107.31,75.31 103.12,75.31 102.49,75.95 J12.A32
109
  Top 0.254: J11.10 111.12,72.26 109.47,72.26 106.93,74.8 102.87,74.8 J12.A33
110
  Top 0.254: J12.A34 99.95,75.69 101.35,74.3 106.55,74.3 J11.9
111
  Top 0.254: J12.A35 98.68,75.44 100.33,73.79 106.17,73.79 108.2,71.75 J11.8
112  (via drill 0.51)
  Top 0.254: J12.A39 94.87,76.45 | 94.87,76.45 J12.A37 97.41,76.45 | J12.A38 94.87,76.45 | J12.A36 97.41,76.45 | v96.39,73.53 97.41,74.55 97.41,76.45
  Bottom 0.254: J11.4 98.04,71.88 v96.39,73.53
113
  Top 0.254: J11.7 105.66,72.9 105.28,73.28 98.55,73.28 97.79,72.52 95.5,72.52 92.33,75.69 J12.A40
114
  Top 0.254: J14.A7 211.33,13.34 214.5,13.34 J13.22
115
  Top 0.254: J14.A8 208.91,13.72 209.8,12.83 212.47,12.83 J13.21
116
  Top 0.254: J14.A15 201.17,13.34 208.41,13.34 209.42,12.32 210.44,12.32 J13.20
117
  Top 0.254: J14.A16 198.75,13.72 199.64,12.83 207.39,12.83 J13.19
118
  Top 0.254: J14.A17 197.49,13.21 198.37,12.32 205.36,12.32 J13.18
119
  Top 0.254: J14.A18 196.22,12.95 197.36,11.81 203.33,11.81 J13.17
120  (via drill 0.51)
  Top 0.254: J14.A19 193.68,14.48 | 193.68,14.48 J14.A21 191.52,14.48 191.13,14.86 J14.A22 | J14.A20 193.68,14.48 | J13.6 179.07,9.53 178.56,10.03 171.07,10.03 167.13,13.97 v167.13,14.73
  Bottom 0.254: J14.A22 191.13,18.54 189.87,19.81 189.87,21.34 189.36,21.84 167.26,21.84 166.12,20.7 166.12,17.91 167.13,16.89 v167.13,14.73
121
  Top 0.254: J13.16 201.29,11.3 196.98,11.3 194.94,13.34 191.01,13.34 J14.A23
122
  Top 0.254: J13.15 199.26,10.79 196.6,10.79 194.56,12.83 189.48,12.83 188.59,13.72 J14.A24
123
  Top 0.254: J13.14 197.23,10.29 196.22,10.29 194.18,12.32 188.21,12.32 187.32,13.21 J14.A25
124
  Top 0.254: J14.A26 186.06,12.95 187.2,11.81 193.8,11.81 195.83,9.78 196.6,9.78 196.85,9.53 J13.13
125
  Top 0.254: J14.A27 184.78,12.7 186.18,11.3 193.42,11.3 194.31,10.41 J13.12
126  (via drill 0.51)
  Top 0.254: J14.A31 180.97,14.48 | 180.97,14.48 J14.A29 183.26,14.48 183.51,14.73 J14.A28 | J13.5 175.13,9.53 170.69,9.53 166.12,14.1 166.12,17.27 v167.13,18.29 | J14.A30 180.97,14.48
  Bottom 0.254: v167.13,18.29 167.13,20.83 167.64,21.34 179.2,21.34 179.71,20.83 179.71,19.86 180.97,18.59 J14.A30
127
  Top 0.254: J13.11 191.77,9.91 190.88,10.79 185.8,10.79 183.26,13.34 179.07,13.34 178.44,13.97 J14.A32
128
  Top 0.254: J13.10 187.07,10.29 185.42,10.29 182.88,12.83 178.82,12.83 J14.A33
129
  Top 0.254: J14.A34 175.9,13.72 177.29,12.32 182.5,12.32 J13.9
130
  Top 0.254: J14.A35 174.62,13.46 176.28,11.81 182.12,11.81 184.15,9.78 J13.8
131  (via drill 0.51)
  Top 0.254: J14.A39 170.81,14.48 | 170.81,14.48 J14.A37 173.35,14.48 | J14.A38 170.81,14.48 | J14.A36 173.35,14.48 | v172.34,11.56 173.35,12.57 173.35,14.48
  Bottom 0.254: J13.4 173.99,9.91 v172.34,11.56
132
  Top 0.254: J13.7 181.61,10.92 181.23,11.3 174.5,11.3 173.74,10.54 171.45,10.54 168.28,13.72 J14.A40
133
  Top 0.254: J16.A7 211.33,44.32 214.5,44.32 J15.22
134
  Top 0.254: J16.A8 208.91,44.7 209.8,43.81 212.47,43.81 J15.21
135
  Top 0.254: J16.A15 201.17,44.32 208.41,44.32 209.42,43.31 210.44,43.31 J15.20
136
  Top 0.254: J16.A16 198.75,44.7 199.64,43.81 207.39,43.81 J15.19
137
  Top 0.254: J16.A17 197.49,44.2 198.37,43.31 205.36,43.31 J15.18
138
  Top 0.254: J16.A18 196.22,43.94 197.36,42.8 203.33,42.8 J15.17
139  (via drill 0.51)
  Top 0.254: J16.A19 193.68,45.47 | 193.68,45.47 J16.A21 191.52,45.47 191.13,45.85 J16.A22 | J16.A20 193.68,45.47 | J15.6 179.07,40.51 178.56,41.02 171.07,41.02 167.13,44.96 v167.13,45.72
  Bottom 0.254: J16.A22 191.13,49.53 189.87,50.8 189.87,52.32 189.36,52.83 167.26,52.83 166.12,51.69 166.12,48.9 167.13,47.88 v167.13,45.72
140
  Top 0.254: J15.16 201.29,42.29 196.98,42.29 194.94,44.32 191.01,44.32 J16.A23
141
  Top 0.254: J15.15 199.26,41.78 196.6,41.78 194.56,43.81 189.48,43.81 188.59,44.7 J16.A24
142
  Top 0.254: J15.14 197.23,41.27 196.22,41.27 194.18,43.31 188.21,43.31 187.32,44.2 J16.A25
143
  Top 0.254: J16.A26 186.06,43.94 187.2,42.8 193.8,42.8 195.83,40.77 196.6,40.77 196.85,40.51 J15.13
144
  Top 0.254: J16.A27 184.78,43.69 186.18,42.29 193.42,42.29 194.31,41.4 J15.12
145  (via drill 0.51)
  Top 0.254: J16.A31 180.97,45.47 | 180.97,45.47 J16.A29 183.26,45.47 183.51,45.72 J16.A28 | J15.5 175.13,40.51 170.69,40.51 166.12,45.09 166.12,48.26 v167.13,49.28 | J16.A30 180.97,45.47
  Bottom 0.254: v167.13,49.28 167.13,51.82 167.64,52.32 179.2,52.32 179.71,51.82 179.71,50.85 180.97,49.58 J16.A30
146
  Top 0.254: J15.11 191.77,40.89 190.88,41.78 185.8,41.78 183.26,44.32 179.07,44.32 178.44,44.96 J16.A32
147
  Top 0.254: J15.10 187.07,41.27 185.42,41.27 182.88,43.81 178.82,43.81 J16.A33
148
  Top 0.254: J16.A34 175.9,44.7 177.29,43.31 182.5,43.31 J15.9
149
  Top 0.254: J16.A35 174.62,44.45 176.28,42.8 182.12,42.8 184.15,40.77 J15.8
150  (via drill 0.51)
  Top 0.254: J16.A39 170.81,45.47 | 170.81,45.47 J16.A37 173.35,45.47 | J16.A38 170.81,45.47 | J16.A36 173.35,45.47 | v172.34,42.55 173.35,43.56 173.35,45.47
  Bottom 0.254: J15.4 173.99,40.89 v172.34,42.55
151
  Top 0.254: J15.7 181.61,41.91 181.23,42.29 174.5,42.29 173.74,41.53 171.45,41.53 168.28,44.7 J16.A40
152
  Top 0.254: J18.A7 211.33,75.31 214.5,75.31 J17.22
153
  Top 0.254: J18.A8 208.91,75.69 209.8,74.8 212.47,74.8 J17.21
154
  Top 0.254: J18.A15 201.17,75.31 208.41,75.31 209.42,74.3 210.44,74.3 J17.20
155
  Top 0.254: J18.A16 198.75,75.69 199.64,74.8 207.39,74.8 J17.19
156
  Top 0.254: J18.A17 197.49,75.18 198.37,74.3 205.36,74.3 J17.18
157
  Top 0.254: J18.A18 196.22,74.93 197.36,73.79 203.33,73.79 J17.17
158  (via drill 0.51)
  Top 0.254: J18.A19 193.68,76.45 | 193.68,76.45 J18.A21 191.52,76.45 191.13,76.83 J18.A22 | J18.A20 193.68,76.45 | J17.6 179.07,71.5 178.56,72.01 171.07,72.01 167.13,75.95 v167.13,76.71
  Bottom 0.254: J18.A22 191.13,80.52 189.87,81.79 189.87,83.31 189.36,83.82 167.26,83.82 166.12,82.68 166.12,79.88 167.13,78.87 v167.13,76.71
159
  Top 0.254: J17.16 201.29,73.28 196.98,73.28 194.94,75.31 191.01,75.31 J18.A23
160
  Top 0.254: J17.15 199.26,72.77 196.6,72.77 194.56,74.8 189.48,74.8 188.59,75.69 J18.A24
161
  Top 0.254: J17.14 197.23,72.26 196.22,72.26 194.18,74.3 188.21,74.3 187.32,75.18 J18.A25
162
  Top 0.254: J18.A26 186.06,74.93 187.2,73.79 193.8,73.79 195.83,71.75 196.6,71.75 196.85,71.5 J17.13
163
  Top 0.254: J18.A27 184.78,74.68 186.18,73.28 193.42,73.28 194.31,72.39 J17.12
164  (via drill 0.51)
  Top 0.254: J18.A31 180.97,76.45 | 180.97,76.45 J18.A29 183.26,76.45 183.51,76.71 J18.A28 | J17.5 175.13,71.5 170.69,71.5 166.12,76.07 166.12,79.25 v167.13,80.26 | J18.A30 180.97,76.45
  Bottom 0.254: v167.13,80.26 167.13,82.8 167.64,83.31 179.2,83.31 179.71,82.8 179.71,81.84 180.97,80.57 J18.A30
165
  Top 0.254: J17.11 191.77,71.88 190.88,72.77 185.8,72.77 183.26,75.31 179.07,75.31 178.44,75.95 J18.A32
166
  Top 0.254: J17.10 187.07,72.26 185.42,72.26 182.88,74.8 178.82,74.8 J18.A33
167
  Top 0.254: J18.A34 175.9,75.69 177.29,74.3 182.5,74.3 J17.9
168
  Top 0.254: J18.A35 174.62,75.44 176.28,73.79 182.12,73.79 184.15,71.75 J17.8
169  (via drill 0.51)
  Top 0.254: J18.A39 170.81,76.45 | 170.81,76.45 J18.A37 173.35,76.45 | J18.A38 170.81,76.45 | J18.A36 173.35,76.45 | v172.34,73.53 173.35,74.55 173.35,76.45
  Bottom 0.254: J17.4 173.99,71.88 v172.34,73.53
170
  Top 0.254: J17.7 181.61,72.9 181.23,73.28 174.5,73.28 173.74,72.52 171.45,72.52 168.28,75.69 J18.A40
GND  (via drill 0.51)
  other vias: 15.11,22.86 65.91,21.59 53.21,21.59 40.51,21.59 27.81,22.86
  pour Top (isolate 0.305): 6.86,29.72 6.86,6.86 75.44,6.86 75.44,29.72
  pour Bottom (isolate 0.305): 6.86,29.72 6.86,6.86 75.44,6.86 75.44,29.72
GND1  (via drill 0.51)
  other vias: 91.06,22.86 141.86,21.59 129.16,21.59 116.46,21.59 103.76,22.86
  pour Top (isolate 0.305): 82.8,29.72 82.8,6.86 151.38,6.86 151.38,29.72
  pour Bottom (isolate 0.305): 82.8,29.72 82.8,6.86 151.38,6.86 151.38,29.72
GND2  (via drill 0.51)
  other vias: 91.06,53.85 141.86,52.58 129.16,52.58 116.46,52.58 103.76,53.85
  pour Top (isolate 0.305): 82.8,60.71 82.8,37.85 151.38,37.85 151.38,60.71
  pour Bottom (isolate 0.305): 82.8,60.71 82.8,37.85 151.38,37.85 151.38,60.71
GND3  (via drill 0.51)
  other vias: 15.11,53.85 65.91,52.58 53.21,52.58 40.51,52.58 27.81,53.85
  pour Top (isolate 0.305): 6.86,60.71 6.86,37.85 75.44,37.85 75.44,60.71
  pour Bottom (isolate 0.305): 6.86,60.71 6.86,37.85 75.44,37.85 75.44,60.71
GND4  (via drill 0.51)
  other vias: 15.11,84.84 65.91,83.57 53.21,83.57 40.51,83.57 27.81,84.84
  pour Top (isolate 0.305): 6.86,91.69 6.86,68.83 75.44,68.83 75.44,91.69
  pour Bottom (isolate 0.305): 6.86,91.69 6.86,68.83 75.44,68.83 75.44,91.69
GND5  (via drill 0.51)
  other vias: 91.06,84.84 141.86,83.57 129.16,83.57 116.46,83.57 103.76,84.84
  pour Top (isolate 0.305): 82.8,91.69 82.8,68.83 151.38,68.83 151.38,91.69
  pour Bottom (isolate 0.305): 82.8,91.69 82.8,68.83 151.38,68.83 151.38,91.69
GND6  (via drill 0.51)
  other vias: 167,22.86 217.81,21.59 205.1,21.59 192.41,21.59 179.71,22.86
  pour Top (isolate 0.305): 158.75,29.72 158.75,6.86 227.33,6.86 227.33,29.72
  pour Bottom (isolate 0.305): 158.75,29.72 158.75,6.86 227.33,6.86 227.33,29.72
GND7  (via drill 0.51)
  other vias: 167,53.85 217.81,52.58 205.1,52.58 192.41,52.58 179.71,53.85
  pour Top (isolate 0.305): 158.75,60.71 158.75,37.85 227.33,37.85 227.33,60.71
  pour Bottom (isolate 0.305): 158.75,60.71 158.75,37.85 227.33,37.85 227.33,60.71
GND8  (via drill 0.51)
  other vias: 167,84.84 217.81,83.57 205.1,83.57 192.41,83.57 179.71,84.84
  pour Top (isolate 0.305): 158.75,91.69 158.75,68.83 227.33,68.83 227.33,91.69
  pour Bottom (isolate 0.305): 158.75,91.69 158.75,68.83 227.33,68.83 227.33,91.69

## Text on the board
Bottom: v02 | v02 | v02 | v02 | v02 | v02 | v02 | v02 | v02
tPlace: LC1 | LC2 | BTA | LC9 | LC8 | LC7 | LC3 | BTB | MISO | LC1 | LC2 | BTA | LC9 | LC8 | LC7 | LC3 | BTB | MISO | LC1 | LC2 | BTA | LC9 | LC8 | LC7 | LC3 | BTB | MISO | AIN | AIN | AIN | AIN | AIN | AIN | SCK | MOSI | SCL | SDA | AIN | AIN | AIN | AIN | AIN | AIN | SCK | MOSI | SCL | SDA | AIN | AIN | AIN | AIN | AIN | AIN | SCK | MOSI | SCL | SDA | 3V3 | 3V3 | 3V3 | 0 | 1 | 2 | 3 | 4 | 5 | 6 | 7 | 8 | 9 | 10 | 11 | 12 | 13 | 14 | 15 | 16 | 19 | 20 | 0 | 1 | 2 | 3 | 4 | 5 | 6 | 7 | 8 | 9 | 10 | 11 | 12 | 13 | 14 | 15 | 16 | 19 | 20 | 0 | 1 | 2 | 3 | 4 | 5 | 6 | 7 | 8 | 9 | 10 | 11 | 12 | 13 | 14 | 15 | 16 | 19 | 20 | LC1 | LC2 | BTA | LC9 | LC8 | LC7 | LC3 | BTB | MISO | LC1 | LC2 | BTA | LC9 | LC8 | LC7 | LC3 | BTB | MISO | LC1 | LC2 | BTA | LC9 | LC8 | LC7 | LC3 | BTB | MISO | AIN | AIN | AIN | AIN | AIN | AIN | SCK | MOSI | SCL | SDA | AIN | AIN | AIN | AIN | AIN | AIN | SCK | MOSI | SCL | SDA | AIN | AIN | AIN | AIN | AIN | AIN | SCK | MOSI | SCL | SDA | 3V3 | 3V3 | 3V3 | 0 | 1 | 2 | 3 | 4 | 5 | 6 | 7 | 8 | 9 | 10 | 11 | 12 | 13 | 14 | 15 | 16 | 19 | 20 | 0 | 1 | 2 | 3 | 4 | 5 | 6 | 7 | 8 | 9 | 10 | 11 | 12 | 13 | 14 | 15 | 16 | 19 | 20 | 0 | 1 | 2 | 3 | 4 | 5 | 6 | 7 | 8 | 9 | 10 | 11 | 12 | 13 | 14 | 15 | 16 | 19 | 20 | LC1 | LC2 | BTA | LC9 | LC8 | LC7 | LC3 | BTB | MISO | LC1 | LC2 | BTA | LC9 | LC8 | LC7 | LC3 | BTB | MISO | LC1 | LC2 | BTA | LC9 | LC8 | LC7 | LC3 | BTB | MISO | AIN | AIN | AIN | AIN | AIN | AIN | SCK | MOSI | SCL | SDA | AIN | AIN | AIN | AIN | AIN | AIN | SCK | MOSI | SCL | SDA | AIN | AIN | AIN | AIN | AIN | AIN | SCK | MOSI | SCL | SDA | 3V3 | 3V3 | 3V3 | 0 | 1 | 2 | 3 | 4 | 5 | 6 | 7 | 8 | 9 | 10 | 11 | 12 | 13 | 14 | 15 | 16 | 19 | 20 | 0 | 1 | 2 | 3 | 4 | 5 | 6 | 7 | 8 | 9 | 10 | 11 | 12 | 13 | 14 | 15 | 16 | 19 | 20 | 0 | 1 | 2 | 3 | 4 | 5 | 6 | 7 | 8 | 9 | 10 | 11 | 12 | 13 | 14 | 15 | 16 | 19 | 20
bPlace: Micro Bit Breakout | Micro Bit Breakout | Micro Bit Breakout | LC1 | LC2 | BTA | LC9 | LC8 | LC7 | LC3 | BTB | MISO | LC1 | LC2 | BTA | LC9 | LC8 | LC7 | LC3 | BTB | MISO | LC1 | LC2 | BTA | LC9 | LC8 | LC7 | LC3 | BTB | MISO | AIN | AIN | AIN | AIN | AIN | AIN | SCK | MOSI | SCL | SDA | AIN | AIN | AIN | AIN | AIN | AIN | SCK | MOSI | SCL | SDA | AIN | AIN | AIN | AIN | AIN | AIN | SCK | MOSI | SCL | SDA | 3V3 | 3V3 | 3V3 | 0 | 1 | 2 | 3 | 4 | 5 | 6 | 7 | 8 | 9 | 10 | 11 | 12 | 13 | 14 | 15 | 16 | 19 | 20 | 0 | 1 | 2 | 3 | 4 | 5 | 6 | 7 | 8 | 9 | 10 | 11 | 12 | 13 | 14 | 15 | 16 | 19 | 20 | 0 | 1 | 2 | 3 | 4 | 5 | 6 | 7 | 8 | 9 | 10 | 11 | 12 | 13 | 14 | 15 | 16 | 19 | 20 | Micro Bit Breakout | Micro Bit Breakout | Micro Bit Breakout | LC1 | LC2 | BTA | LC9 | LC8 | LC7 | LC3 | BTB | MISO | LC1 | LC2 | BTA | LC9 | LC8 | LC7 | LC3 | BTB | MISO | LC1 | LC2 | BTA | LC9 | LC8 | LC7 | LC3 | BTB | MISO | AIN | AIN | AIN | AIN | AIN | AIN | SCK | MOSI | SCL | SDA | AIN | AIN | AIN | AIN | AIN | AIN | SCK | MOSI | SCL | SDA | AIN | AIN | AIN | AIN | AIN | AIN | SCK | MOSI | SCL | SDA | 3V3 | 3V3 | 3V3 | 0 | 1 | 2 | 3 | 4 | 5 | 6 | 7 | 8 | 9 | 10 | 11 | 12 | 13 | 14 | 15 | 16 | 19 | 20 | 0 | 1 | 2 | 3 | 4 | 5 | 6 | 7 | 8 | 9 | 10 | 11 | 12 | 13 | 14 | 15 | 16 | 19 | 20 | 0 | 1 | 2 | 3 | 4 | 5 | 6 | 7 | 8 | 9 | 10 | 11 | 12 | 13 | 14 | 15 | 16 | 19 | 20 | Micro Bit Breakout | Micro Bit Breakout | Micro Bit Breakout | LC1 | LC2 | BTA | LC9 | LC8 | LC7 | LC3 | BTB | MISO | LC1 | LC2 | BTA | LC9 | LC8 | LC7 | LC3 | BTB | MISO | LC1 | LC2 | BTA | LC9 | LC8 | LC7 | LC3 | BTB | MISO | AIN | AIN | AIN | AIN | AIN | AIN | SCK | MOSI | SCL | SDA | AIN | AIN | AIN | AIN | AIN | AIN | SCK | MOSI | SCL | SDA | AIN | AIN | AIN | AIN | AIN | AIN | SCK | MOSI | SCL | SDA | 3V3 | 3V3 | 3V3 | 0 | 1 | 2 | 3 | 4 | 5 | 6 | 7 | 8 | 9 | 10 | 11 | 12 | 13 | 14 | 15 | 16 | 19 | 20 | 0 | 1 | 2 | 3 | 4 | 5 | 6 | 7 | 8 | 9 | 10 | 11 | 12 | 13 | 14 | 15 | 16 | 19 | 20 | 0 | 1 | 2 | 3 | 4 | 5 | 6 | 7 | 8 | 9 | 10 | 11 | 12 | 13 | 14 | 15 | 16 | 19 | 20